# Altium PCB RouterFinal.PcbDoc
Units mil, origin at the board's own origin, x right, y up, seen from the top; angles counter-clockwise.
Board outline 3660 x 1205 mil, 4 copper layers (Top Layer, Internal Plane 1, Internal Plane 2, Bottom Layer); 56 components, 29 nets, 161 pads, 15 vias.
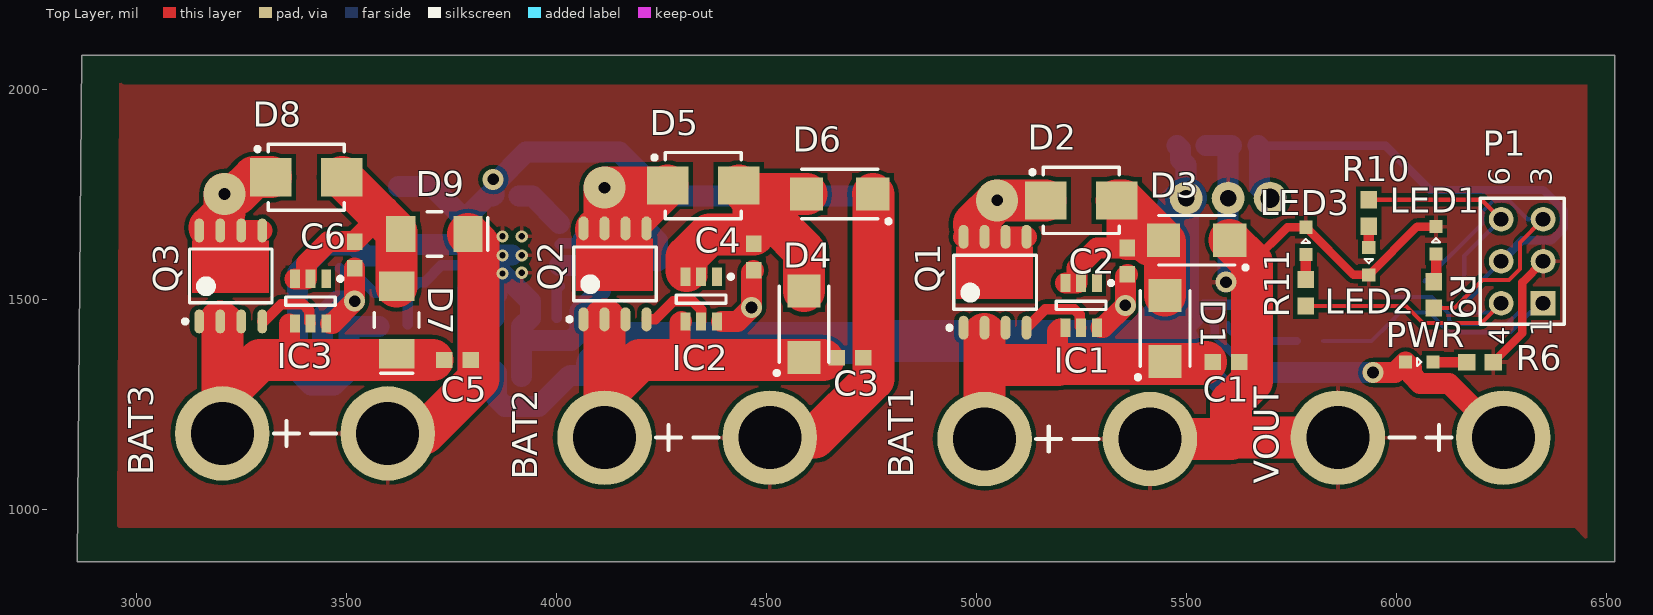
[diagram p0: Top Layer view]
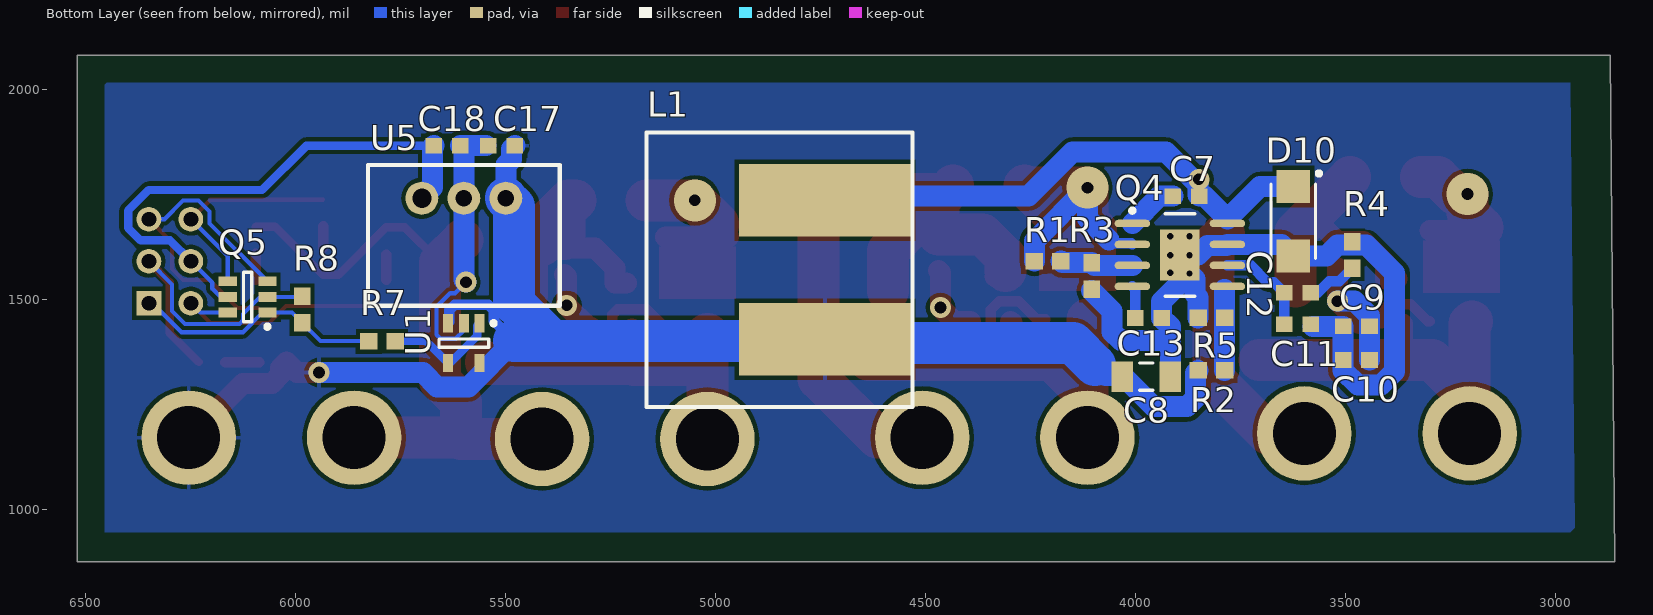
[diagram p1: Bottom Layer view, seen from below]
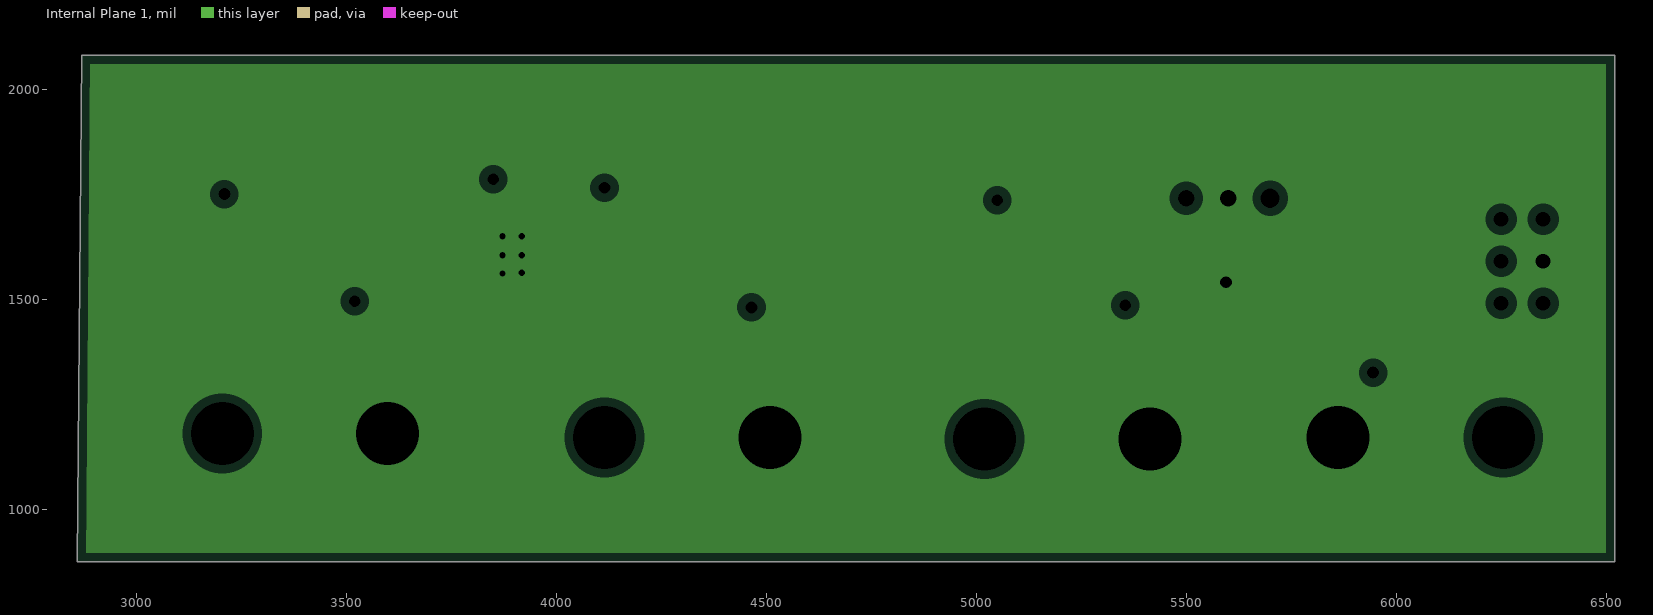
[diagram p2: Internal Plane 1, clearances drawn from the general rule]
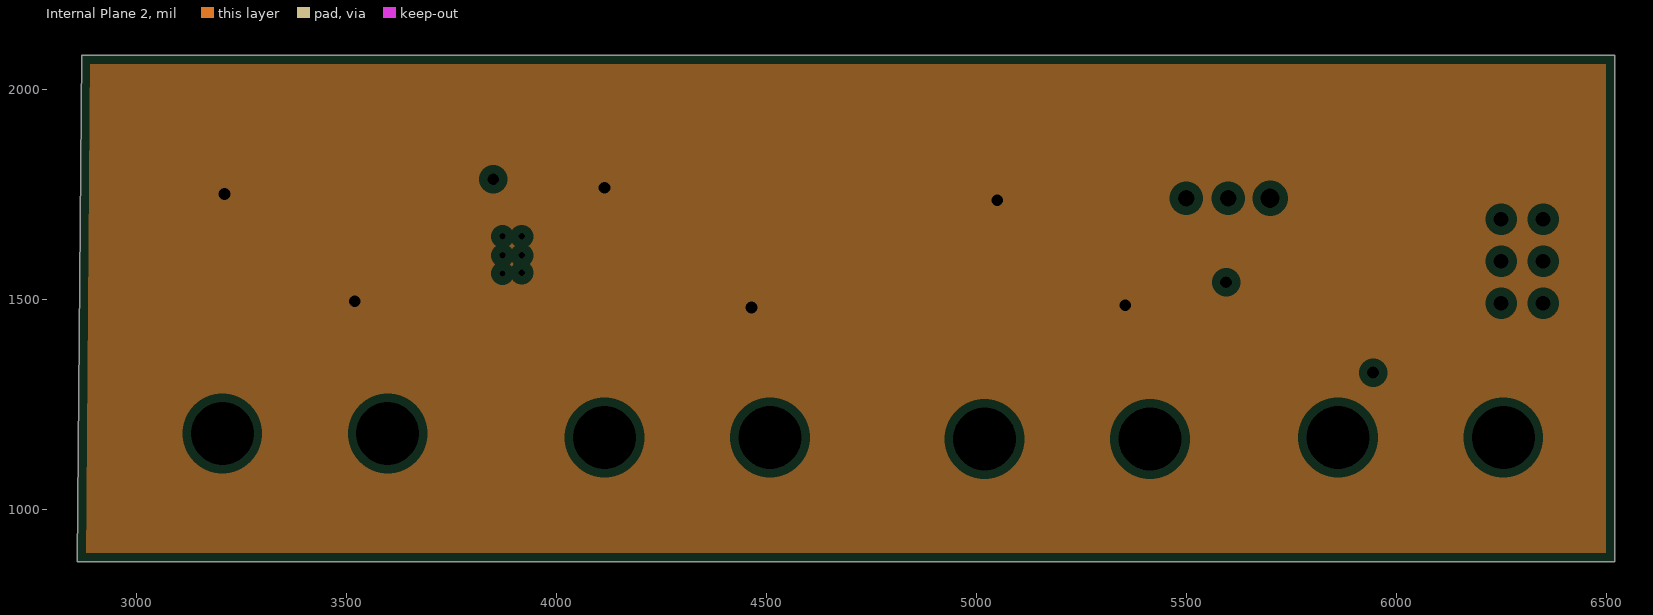
[diagram p3: Internal Plane 2, clearances drawn from the general rule]

## Layer stack, top to bottom
Top Layer: signal copper 1.4
Dielectric: core 12.6, FR-4, Dk 4.8
Internal Plane 1: plane copper 1.4, net GND
Dielectric: prepreg 12.6, FR-4, Dk 4.8
Internal Plane 2: plane copper 1.4, net RAIL+
Dielectric: core 12.6, FR-4, Dk 4.8
Bottom Layer: signal copper 1.4

## Board outline
2870,2080 6520,2080 6520,875 2860,875

## Design rules (kind name [scope] priority, off if disabled: settings)
Clearance [All] p1: gap=10
PlaneClearance [All] p1: clearance=20
PlaneConnect [All] p1: planeconnectstyle=Relief reliefexpansion=20 reliefentries=4 reliefconductorwidth=10 reliefairgap=10
PolygonConnect [All] p1: connectstyle=Relief reliefconductorwidth=10 reliefentries=4 polygonreliefangle="90 Angle" airgapwidth=10
RoutingVias [All] p1: holewidth=28 width=50 viastyle="Through Hole" minholewidth=28 minwidth=50 maxholewidth=28 maxwidth=50
SolderMaskExpansion [All] p1: expansion=4
Width [All] p1: maxlimit=100 minlimit=10 preferedwidth=25
26 further rules are at their usual default settings.

## Classes and differential pairs
component class Switching_Regulator: C7 C8 C9 C10 C11 C12 C13 D10 L1 PWR Q4 R1 R2 R3 R4 R5 R6 VOUT
component class RouterBatteryLED: C17 C18 LED1 LED2 LED3 P1 Q5 R7 R8 R9 R10 R11 U1 U5
component class Batteries: BAT1 BAT2 BAT3 C1 C2 C3 C4 C5 C6 D1 D2 D3 D4 D5 D6 D7 D8 D9 IC1 IC2 IC3 Q1 Q2 Q3

## Components (designator, comment, footprint, x,y, rotation, side; value= is the part's Value field where it differs from the comment)
BAT1 "BATWIRE" BATWIRE12 5020,1166.73 r0 top
BAT2 "BATWIRE" BATWIRE12 4115,1170 r0 top
BAT3 "BATWIRE" BATWIRE12 3205,1180 r0 top
C1 "Cap" CAPC0603 5595,1350 r0 top
C2 "Cap" CAPC0603 5360,1590 r90 top
C3 "Cap" CAPC0603 4700,1360 r0 top
C4 "Cap" CAPC0603 4470,1600 r90 top
C5 "Cap" CAPC0603 3765,1355 r0 top
C6 "Cap" CAPC0603 3520,1605 r90 top
C7 "Cap" CAPC0603 3880,1745 r0 bottom
C8 "Cap" CAPC1206 3975,1315 r180 bottom
C9 "Cap" CAPC0603 3475,1435 r0 bottom
C10 "Cap" CAPC0603 3475,1355 r0 bottom
C11 "Cap" CAPC0603 3615,1440 r180 bottom
C12 "Cap" CAPC0603 3615,1515 r180 bottom
C13 "Cap" CAPC0603 3970,1455 r180 bottom
C17 "Cap" CAPC0603 5510,1865 r0 bottom
C18 "Cap" CAPC0603 5640,1865 r180 bottom
D1 "SS16T3G" SS16T3G 5450,1430 r90 top
D2 "SMBJ100A-13-F" SMBJ100A-13-F 5250,1735 r0 top
D3 "SS16T3G" SS16T3G 5525,1640 r180 top
D4 "SS16T3G" SS16T3G 4590,1440 r90 top
D5 "SMBJ100A-13-F" SMBJ100A-13-F 4350,1770 r0 top
D6 "SS16T3G" SS16T3G 4675,1750 r180 top
D7 "SS16T3G" SS110-TP 3620,1450 r90 top
D8 "SMBJ100A-13-F" SMBJ100A-13-F 3405,1790 r0 top
D9 "SS16T3G" SS110-TP 3710,1655 r180 top
D10 "DFLS160" RSX501L-20TE25 3625,1685 r270 bottom
IC1 "LM5050MK-2/NOPB" LM5050MK-2/NOPB 5250,1485 r270 top
IC2 "LM5050MK-2/NOPB" LM5050MK-2/NOPB 4345,1500 r270 top
IC3 "LM5050MK-2/NOPB" LM5050MK-2/NOPB 3415,1495 r270 top
L1 "37392C" 37392C 4740,1735 r0 bottom
LED1 "LED" LED0603 6095,1640 r90 top
LED2 "LED" LED0603 5935,1590 r270 top
LED3 "LED" LED0603 5785,1638.5 r90 top
P1 "Header 3X2A" HDR2X3_CEN 6350,1490 r90 top
PWR "LED" LED0603 6055,1350 r0 top
Q1 "TPCA8052-H(TE12LQM" TPCA8052-H(TE12LQM 5045,1540 r90 top
Q2 "TPCA8052-H(TE12LQM" TPCA8052-H(TE12LQM 4140,1560 r90 top
Q3 "TPCA8052-H(TE12LQM" TPCA8052-H(TE12LQM 3225,1555 r90 top
Q4 "TPS54332DDA" TPS54332DDA 3895,1605 r180 bottom
Q5 "ATTiny5 Atmel Processor" ATTiny5 6115,1505 r0 bottom
R1 "Res" RES0603 4210,1590 r180 bottom
R2 "Res" RES0603 3820,1330 r0 bottom
R3 "Res" RES0603 4105,1555 r270 bottom
R4 "Res" RES0603 3485,1605 r90 bottom
R5 "Res" RES0603 3820,1455 r180 bottom
R6 "Res" RES0603 6200,1350 r0 top
R7 "Res" RES0603 5795,1400 r180 bottom
R8 "Res" RES0603 5985,1475 r90 bottom
R9 "Res" RES0603 6090,1510 r90 top
R10 "Res" RES0603 5935,1705 r270 top
R11 "Res" RES0603 5785,1515 r90 top
U1 "IC OPAMP GP 600KHZ TSOT23-5" SOT95P280X100-5N 5600,1395 r270 bottom
U5 "R-78C5.0-1.0" R-78C5.0-1.0 5500,1740 r0 bottom
VOUT "BATWIRE" BATWIRE12 6255,1170 r180 top

## Footprints (in the part's own frame and the unit in brackets; to place one, negate y for a bottom-side part, rotate by r counter-clockwise, add the part's x,y. Pads: shape width x height; smd on the part's side, far side on the other; paste and mask are expansions set on the pad)
37392C [mm] "INDUCTOR 3.90UH 10.0A SMD"
  rect 10.4x4.4 smd: 0(0,8.4) 1(0,0)
  silkscreen extent -5.3,-4.1 10.8,12.5, body extent -5.5,-4.3 11,12.6, height 6.8
ATTiny5 [mm] "SOT23, 6-Leads, Body 2.90x2.80mm, Pitch 0.95mm, IPC Medium Density"
  rect 1.1x0.6 smd: 1(-1.2,0.95) 2(-1.2,0) 3(-1.2,-0.95) 4(1.2,-0.95) 5(1.2,0) 6(1.2,0.95)
  silkscreen extent -1.32,-1.5 0.25,1.92, body extent -0.87,-1.5 0.87,1.5, height 1.45
BATWIRE12 [mm] "Two 12AWG wires soldered directly to the board"
  round 5.715 hole 3.81: +(0,0) -(10,0)
  silkscreen extent 3.13,-0.75 6.87,0.75
CAPC0603 [mm] "Chip Capacitor, 2-Leads, Body 1.60x0.80mm, IPC Medium Density"
  rect 1x0.95 smd: 1(-0.8,0) 2(0.8,0)
  body extent -0.88,-0.48 0.87,0.48, height 0.8
CAPC1206 [mm] "Chip Capacitor, 2-Leads, Body 3.20x1.60mm, IPC Medium Density"
  rect 1.3x1.85 smd: 1(-1.45,0) 2(1.45,0)
  silkscreen extent -0.4,-0.82 0.4,0.82, body extent -1.7,-0.9 1.7,0.9, height 1.8
HDR2X3_CEN [mm] "Connector; Header; 3x2 Position"
  rect 1.5x1.5 hole 0.9: 1(0,0)
  round 1.5 hole 0.9: 2(2.54,0) 3(5.08,0) 4(0,2.54) 5(2.54,2.54) 6(5.08,2.54)
  silkscreen extent -1.27,-1.27 6.35,3.81
LED0603 [mm] "Chip LED, 2-Leads, Body 1.60x0.80mm, IPC Medium Density"
  rect 0.8x0.8 smd: A(-0.825,0) C(0.825,0)
  silkscreen extent -0.13,-0.25 0.12,0.25, body extent -0.88,-0.48 0.87,0.47, height 0.8
LM5050MK-2/NOPB [mm] "IC OR CTRLR N+1 6SOT"
  rect 1.1x0.6 smd: 1(-1.35,0.95) 2(-1.35,0) 3(-1.35,-0.95) 4(1.35,-0.95) 5(1.35,0) 6(1.35,0.95)
  silkscreen extent -1.47,-1.5 0.25,1.93, body extent -0.87,-1.52 0.87,1.53, height 1.1
R-78C5.0-1.0 [mm] "CONV DC/DC 1A 5V OUT SIP VERT"
  round 2 hole 1: 1(0,0) 2(2.54,0)
  round 2 hole 1.15: 3(5.08,0)
  silkscreen extent -3.26,-2 8.34,6.5, body extent -3.2,-1.9 8.3,6.5, height 10.8
RES0603 [mm] "Chip Resistor, 2-Leads, Body 1.60x0.80mm, IPC Medium Density"
  rect 1.05x1 smd: 1(-0.8,0) 2(0.8,0)
  body extent -0.88,-0.48 0.87,0.47, height 0.8
RSX501L-20TE25 [mm] "DIODE SCHOTTKY 20V 5A PMDS"
  rect 2x2 smd: A(2.1,0) C(-2.1,0)
  silkscreen extent -3.02,-1.35 2.25,1.67, body extent -2.25,-1.3 2.25,1.3, height 2
SMBJ100A-13-F [mm] "TVS DIODE 100VWM 162VC SMB"
  rect 2.5x2.3 smd: A(2.15,0) C(-2.15,0)
  silkscreen extent -3.07,-2 2.3,2, body extent -2.29,-1.97 2.28,1.97, height 2.62
SOT95P280X100-5N [mm] "SOT23, 5-Leads, Body 2.90x2.80mm, Pitch 0.95mm, IPC Medium Density"
  rect 1.1x0.6 smd: 1(-1.2,0.95) 2(-1.2,0) 3(-1.2,-0.95) 4(1.2,-0.95) 5(1.2,0.95)
  silkscreen extent -1.32,-1.5 0.25,1.92, body extent -0.87,-1.5 0.87,1.5, height 1
SS16T3G [mm] "DIODE SCHOTTKY 60V 1A SMA"
  rect 2x2 smd: A(2,0) C(-2,0)
  silkscreen extent -3.07,-1.5 2.3,1.77, body extent -2.29,-1.46 2.28,1.46, height 2.2
SS110-TP [mil] "DIODE SCHOTTKY 100V 1A SMA"
  rect 70x85 smd: A(80,0) C(-80,0)
  silkscreen extent -127,-53 18,53, body extent -84,-52 84,52, height 116
TPCA8052-H(TE12LQM [mm] "MOSFET N-CH 40V 20A 8SOP"
  oval 1.45x0.6 smd: D(2.75,-1.905) D(2.75,-0.635) D(2.75,0.635) D(2.75,1.905) G(-2.75,-1.905) S(-2.75,-0.635) S(-2.75,0.635) S(-2.75,1.905)
  Top Layer region: -1.025,-2.3 2.15,-2.3 2.15,2.35 -1.025,2.35
  silkscreen extent -2.87,-2.5 1.63,2.88, body extent -2.5,-2.5 2.5,2.5, height 0.95
TPS54332DDA [mm] "IC REG BUCK ADJ 3.5A 8SOPWRPAD"
  oval 2.15x0.45 smd: 1(-2.875,1.905) 2(-2.875,0.635) 3(-2.875,-0.635) 4(-2.875,-1.905) 5(2.875,-1.905) 6(2.875,-0.635) 7(2.875,0.635) 8(2.875,1.905)
  rect 2.4x3.1 smd: 7(0,0)
  silkscreen extent -3,-2.5 0.9,2.8, body extent -2,-2.5 2,2.5, height 1.7

## Part data
BAT1 BAT2 BAT3 VOUT: "Two large gauge leads soldered directly to the board."
D1 D3 D4 D6 D7 D9: "DIODE SCHOTTKY 60V 1A SMA"
D2 D5 D8: "TVS DIODE 100VWM 162VC SMB"
D10: "1.0A Surface Mount Schottky Barrier Rectifier"
IC1 IC2 IC3: "IC OR CTRLR N+1 6SOT"
L1: "INDUCTOR 3.90UH 10.0A SMD"
P1: "Header, 3-Pin, Dual row"
Q1 Q2 Q3: library part TPCA8052-H, "MOSFET N-CH 40V 20A 8SOP"
Q4: "IC REG BUCK ADJ 3.5A 8SOPWRPAD"
U5: "CONV DC/DC 1A 5V OUT SIP VERT"

## Via types
v1: diameter 50, hole 28, Top Layer to Bottom Layer, 6 vias
v2: diameter 29, hole 15, Top Layer to Bottom Layer, tented both sides, 6 vias
v3: diameter 100, hole 28, Top Layer to Bottom Layer, 3 vias

## Nets (pads, with @x,y where several pads share a name; then routed paths per layer and width w, separated by ;. In a path a pad name is that pad's centre, name@x,y a point inside that pad or via, vN(x,y) a via of type N, cw(c..) or ccw(c..) an arc to the next point about the centre after c; other vN are vias at no path point)
5V: C18.1 P1.5 Q5.5 U5.3 | length 1283.8
  Bottom Layer w10: Q5.5 6179.52,1505 6198.9,1524.38 6198.9,1538.9 P1.5
  Bottom Layer w20: C18.1 5975,1865 6080.47,1759.53 6350.52,1759.53 6399.53,1710.52 6399.53,1669.48 6369.57,1639.53 6299.53,1639.53 P1.5
  Bottom Layer w50: C18.1 5674.37,1862.13 5674.37,1765.63 U5.3
12V: C8.1 C17.1 L1.0 PWR.A R2.2 U1.3 U1.5 U5.1 VOUT.+ | length 3422.7
  Top Layer w50: v1(5945,1325) 5997.52,1325 PWR.A 6036.73,1335.79 6036.73,1319.75 6057.23,1299.25 6125.75,1299.25 VOUT.+
  Bottom Layer w25: 5480,1400 5528.29,1448.29 5528.29,1473.22 5541.47,1486.4 5621.13,1486.4 5634.31,1473.22 5634.31,1445.33 U1.3
  Bottom Layer w50: R2.2 3857.32,1324.17 3857.32,1264.09 3877.83,1243.58 3958,1243.58 4029.42,1315 C8.1 4034.59,1317.5 4072.09,1317.5 ; C17.1 5486.81,1856.69 5486.81,1831.8 5500,1818.61 U5.1 ; 5480,1400 5588.9,1291.1 5663.71,1291.1 5697.61,1325 v1(5945,1325)
  Bottom Layer w100: 4097.09,1342.5 4149.59,1395 4730.71,1395 L1.0 4744.29,1400 5390.21,1400 ; 5480,1400 5390.21,1400 ; U5.1 5480,1720 5480,1489.79 5390.21,1400
BATT1: BAT1.+ C1.1 D1.C IC1.4 Q1.S | length 870.1
  Top Layer w50: 5195,1343.19 5193.19,1345 5193.19,1422.28 5199.41,1428.5
  Top Layer w100: BAT1.+ 5020,1345 ; Q1.S@5020,1416.73 5020,1345 ; 5193.19,1345 5541.81,1345 C1.1@5546.81,1350 ; 5195,1343.19 5021.81,1343.19 5020,1345
BATT2: BAT2.+ C3.1 D4.C IC2.4 Q2.S | length 930.1
  Top Layer w50: 4295,1355 4295,1443.66 IC2.4@4298.19,1446.85
  Top Layer w100: BAT2.+ BAT2.+@4115,1270 ; Q2.S@4115,1451.73 BAT2.+@4115,1270 ; 4635,1355 4295,1355 4200,1355 BAT2.+@4115,1270
BATT3: BAT3.+ C5.1 D7.C IC3.4 Q3.S | length 875.3
  Top Layer w50: 3365,1370.75 3365,1440
  Top Layer w100: Q3.S@3200,1446.73 3205,1441.73 BAT3.+@3205,1265 ; BAT3.+ BAT3.+@3205,1265 ; 3705,1355 3295,1355 BAT3.+@3205,1265
GND: BAT1.- BAT2.- BAT3.- C1.2 C3.2 C5.2 C8.2 C9.2 C10.2 C11.2 C13.2 C17.2 C18.2 D3.C D6.C D9.C D10.A LED1.C LED2.C LED3.C P1.2 Q4.7 Q5.2 R3.2 R4.2 R5.1 R6.2 R8.2 U1.2 U5.2 VOUT.- | length 6121.4
  Top Layer w20: 5656.81,1586.93 5740.87,1670.98 LED3.C 5898.46,1557.52 LED2.C 6049.96,1672.48 LED1.C ; R6.2 6300.47,1418.98 6300.47,1539.53 6350,1589.06 P1.2
  Top Layer w100: BAT3.- 3685.56,1180 3815,1309.44 3815,1630 D9.C ; BAT2.- 4615,1170 4755,1310 4755,1748.74 D6.C ; BAT1.- 5606.73,1166.73 ; D3.C 5656.81,1586.93 5656.81,1304.44 5606.73,1254.36 5606.73,1170 ; 5610,1170 VOUT.-@5856.3,1170
  Bottom Layer w10: v1(5595,1540) 5621.1,1513.9 5632.52,1513.9 5664.9,1481.52 5664.9,1415.07 5655.43,1405.59 5619.38,1405.59 5600,1424.97 U1.2 ; R8.2@5986.5,1505 Q5.2 6085.03,1505 6125.59,1464.44 6125.59,1449.57 6134.38,1440.79 6263.76,1440.79 6294.53,1471.56 6294.53,1534.53 P1.2
  Bottom Layer w50: C11.2@3578.5,1435 C9.2 C10.2 3506.5,1330.11 3471.39,1295 3415.62,1295 3383.5,1327.12 3383.5,1561.86 3450.82,1629.17 3519.18,1629.17 3546.03,1602.32 D10.A 3652.68,1630 3781.81,1630 3784.31,1627.5 3829.8,1627.5 3852.3,1605 Q4.7@3895,1605 ; R5.1 3851.5,1504.2 3859.13,1511.83 3859.13,1547.84 v2(3872,1560.71) 3938.5,1494.2 C13.2 3917.91,1434.41 3917.91,1405 ; C8.2 3917.91,1405 ; R3.2@4105,1520 4056.18,1471.18 4056.18,1421.8 4035.68,1401.3 3921.61,1401.3 3917.91,1405 ; C17.2@5546.81,1865 C18.2 5600,1856.5 U5.2 5600,1545 v1(5595,1540)
  other v2: 3918,1562.68 3872,1604.02 3918,1604.02 3872,1649.29 3918,1649.29
NetC2_2: C2.2 D1.A D2.A D3.A IC1.2 IC1.3 | length 648.5
  Top Layer w50: IC1.3 5240.59,1538.15 5240.59,1574.3 5287.79,1621.5 C2.2
  Top Layer w100: D3.A@5413.37,1628.37 5398.24,1643.5 5360,1643.5 5360,1709.65 D2.A 5351.26,1735 D3.A 5450,1636.26 D1.A
NetC4_2: C4.2 D4.A D5.A D6.A IC2.2 IC2.3 | length 687.1
  Top Layer w50: IC2.3 IC2.2@4335.59,1553.15
  Top Layer w100: IC2.3@4310.59,1566.85 4310.59,1599.66 4364.44,1653.5 4470,1653.5 4470,1734.65 D5.A ; D5.A@4470,1750 D6.A ; 4525.45,1679.19 4590,1614.65 D4.A
NetC6_2: C6.2 D7.A D8.A D9.A IC3.2 IC3.3 | length 602.3
  Top Layer w50: IC3.3 3405.59,1548.15 3405.59,1584.3 3457.79,1636.5 C6.2 3579.82,1696.32 3579.82,1699.82
  Top Layer w100: D8.A 3579.82,1699.82 3620,1659.65 D7.A
NetC7_1: C7.1 D10.C L1.1 Q4.8 | length 1275.7
  Bottom Layer w50: D10.C 3704.13,1767.68 3781.81,1690 3836.81,1745 C7.1 3851.5,1747.99 3851.5,1772.88 3928.61,1850 4150.21,1850 4255.21,1745 4730,1745 L1.1
  other v1: 3850,1785
NetC7_2: C7.2 Q4.1 | length 123.6
  Bottom Layer w50: C7.2 3943.19,1745 Q4.1
NetC11_1: C11.1 C12.1 Q4.6 | length 237.2
  Bottom Layer w25: C11.1 C12.1 3671.95,1540.45 3686.87,1540.45 3726.42,1580 Q4.6
NetC12_2: C12.2 R4.1 | length 122.7
  Bottom Layer w25: R4.1 3516,1542.5 3539.68,1542.5 3567.18,1515 C12.2
NetC13_1: C13.1 Q4.4 | length 77.8
  Bottom Layer w25: C13.1 4001.5,1523.31 Q4.4
NetIC1_5: IC1.5 Q1.G | length 183
  Top Layer w25: Q1.G 5164.27,1476 5233.73,1476 5246.91,1462.82 5246.91,1434.94 IC1.5
NetIC2_5: IC2.5 Q2.G | length 183.9
  Top Layer w25: Q2.G 4235.9,1451.73 4278.51,1494.35 4325.38,1494.35 4345.69,1474.04 IC2.5@4345.69,1446.85
NetIC3_5: IC3.5 Q3.G | length 167.1
  Top Layer w25: Q3.G 3304.56,1446.73 3345.32,1487.5 3397.23,1487.5 3412.5,1472.23 3412.5,1444.35 IC3.5
NetLED1_A: LED1.A R9.2 | length 61
  Top Layer w25: R9.2@6095,1546.5 LED1.A
NetLED2_A: LED2.A R10.2 | length 51
  Top Layer w25: LED2.A R10.2
NetLED3_A: LED3.A R11.2 | length 59.5
  Top Layer w25: R11.2 LED3.A
NetPWR_C: PWR.C R6.1 | length 81
  Top Layer w25: PWR.C R6.1
NetQ4_3: Q4.3 R1.2 R3.1 | length 174.5
  Bottom Layer w50: Q4.3 4098.5,1580 R3.1 4175,1586.5 R1.2
NetQ4_5: Q4.5 R2.1 R5.2 | length 193.3
  Bottom Layer w50: R2.1 R5.2 Q4.5@3788.5,1523.31
NetR7_2: R7.2 U1.1 U1.4 | length 275.9
  Bottom Layer w20: U1.1 5568.19,1436.65 5568.19,1412.31 5632.74,1347.76 U1.4 5689.65,1400 R7.2
PB2: P1.6 Q5.4 R10.1 | length 518.2
  Top Layer w10: R10.1 6203.5,1736.5 P1.6
  Bottom Layer w10: Q5.4 6162.24,1602.24 P1.6
PB3/RESET: P1.4 Q5.6 R11.1 | length 598.4
  Top Layer w10: R11.1 6023.43,1483.5 6064.1,1442.83 6202.83,1442.83 P1.4
  Bottom Layer w10: Q5.6 6227.6,1467.6 P1.4
RAIL+: C2.1 C4.1 C6.1 C9.1 C10.1 D2.C D5.C D8.C IC1.6 IC2.6 IC3.6 Q1.D Q2.D Q3.D Q4.2 R1.1 | length 2150.6
  Top Layer w50: Q3.D@3200,1663.27 3250,1663.27 Q3.D@3300,1663.27 ; IC3.6@3462.5,1441.85 3466.85,1441.85 v1(3520,1495) C6.1 ; IC2.6@4393.19,1446.85 4431.85,1446.85 v1(4465,1480) 4465,1563.5 C4.1 ; Q1.D@4970,1648.27 5020,1648.27 5070,1648.27 Q1.D@5120,1648.27 ; IC1.6@5297.5,1431.85 5301.85,1431.85 v1(5355,1485) 5355,1553.5 C2.1
  Top Layer w100: 3175,1670 3210,1705 v3(3210,1750) 3240,1750 3280,1790 D8.C ; 4095,1665 4115,1685 v3(4115,1765) D5.C@4260.35,1765 ; Q2.D@4165,1668.27 Q2.D@4165,1669.65 ; 4189.31,1693.96 D5.C@4260.35,1765 ; D5.C D5.C@4260.35,1765 ; 4995,1675 4995,1680 v3(5050,1735) D2.C
  Bottom Layer w25: Q4.2 4010.69,1632.5 4056.18,1632.5 4063.68,1640
  Bottom Layer w50: C10.1 C9.1 3443.5,1459.89 3478.61,1495 v1(3520,1495) ; 4063.68,1640 4115,1691.32 v3(4115,1765) 4241.5,1638.5 R1.1
TPICLK/PB1: P1.3 Q5.3 R9.1 | length 781.4
  Top Layer w10: R9.1 6138.5,1478.5 6205.47,1545.47 6268.44,1545.47 6294.53,1571.56 6294.53,1634.53 P1.3
  Bottom Layer w10: Q5.3 6205.47,1680.12 6205.47,1708.44 6231.56,1734.53 6268.44,1734.53 6312.97,1690 P1.3
TPIDATA/PB0: P1.1 Q5.1 R7.1 R8.1 | length 599.6
  Bottom Layer w10: R7.1 5941.5,1400 R8.1 6009.09,1467.6 Q5.1 6079.28,1467.6 6126.09,1420.79 6272.04,1420.79 6341.26,1490 P1.1
pads on no net: IC1.1 IC2.1 IC3.1

## Polygon pours and split planes (outlines as drawn)
GND on Top Layer "Top Overlay-No Net" (solid, pour order 2): 2960,2020 2970,2010 6455,2010 6455,925 6425,955 2955,955
12V on Bottom Layer "Top Overlay-No Net" (solid, pour order 4): 2965,2015 6450,2015 6455,2010 6455,945 2965,945 2955,955
GND on Internal Plane 1 (split plane): 6499.9,895.1 2880.26,895.1 2889.93,2059.9 6499.9,2059.9
RAIL+ on Internal Plane 2 (split plane): 6499.9,895.1 2880.26,895.1 2889.93,2059.9 6499.9,2059.9

## Text inside footprints (layer, text, board x,y; h text height)
P1: Top Overlay "4" at 6270,1390 h50 r90; Top Overlay "1" at 6370,1410 h50 r90; Top Overlay "3" at 6370,1770 h50 r90; Top Overlay "6" at 6270,1770 h50 r90